# EAGLE board programmer01 (EAGLE 4.14)
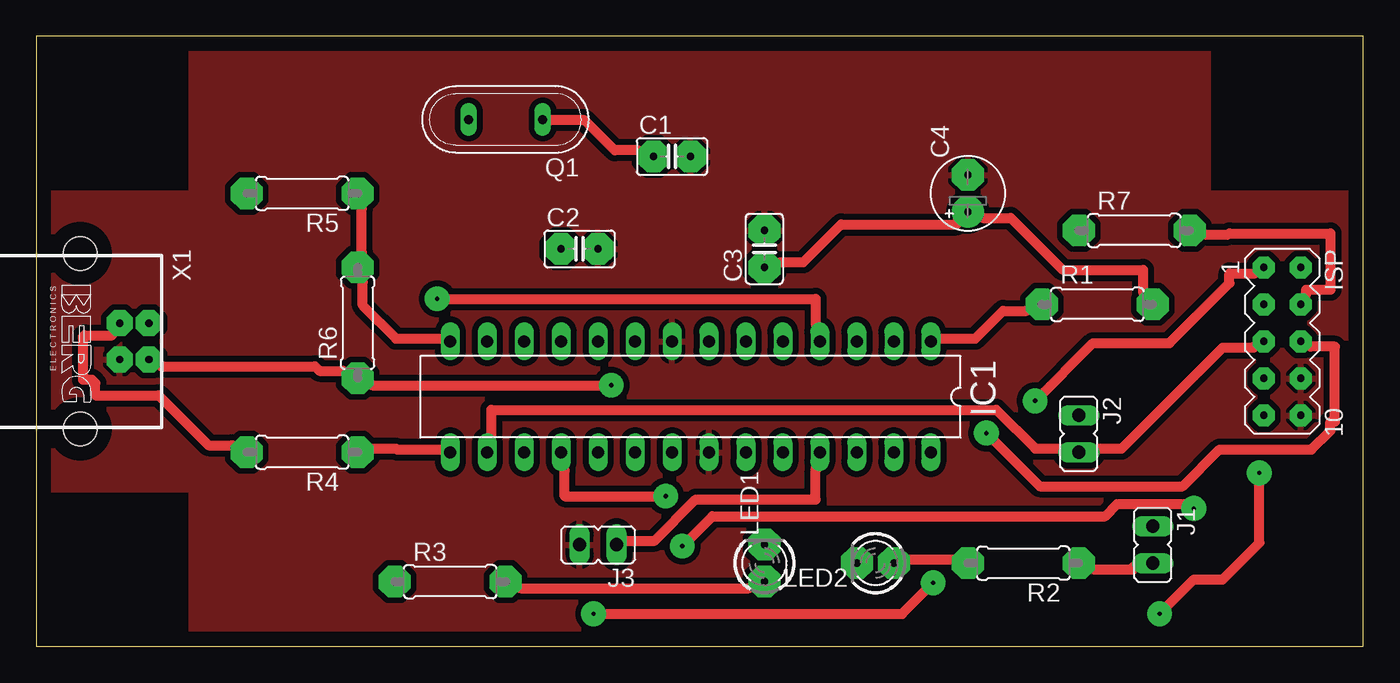
[diagram p0: board, top side]
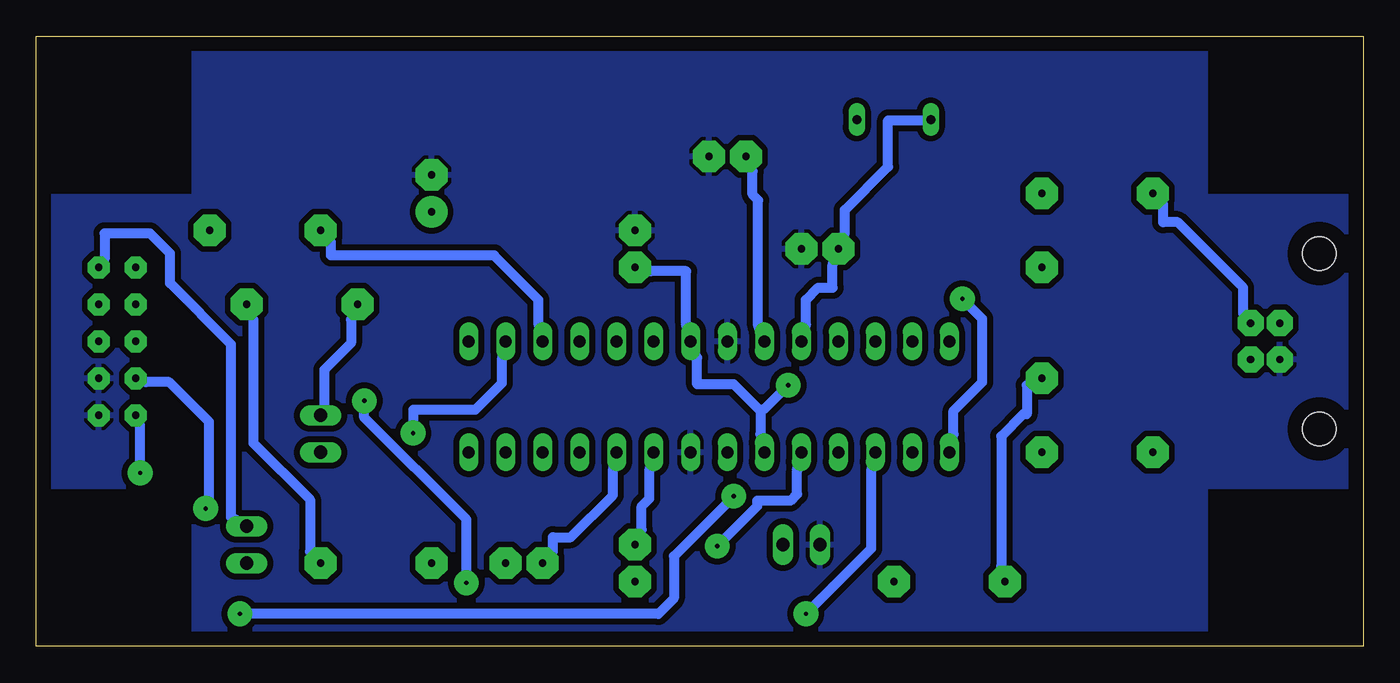
[diagram p1: board, bottom side, seen from below]

Size 91.11 x 41.9 mm. Coordinates in mm from the lower left corner, seen from the top.
Outline: 0,0 91.11,0 91.11,41.9 0,41.9 0,0
Copper layers (1*16): Top 0.035mm / dielectric 1.5mm / Bottom 0.035mm
Design rules "default": minimum track width 0.7mm, minimum drill 0.3mm, track to track 0.4mm, track to pad 0.4mm, pad to pad 0.4mm, via to via 0.4mm, smd to smd 0.4mm, copper to edge 40mil, drill to drill 8mil, minimum pad ring 10mil, minimum via ring 0.7mm, stop-mask expansion 4mil, vias tented up to drill 0mil, thermal gap 10mil
bRestrict: area 0.5,0.6 to 10.6,10.8; area 80.5,0.6 to 90.6,10.8; area 80.5,31.1 to 90.6,41.3; area 0.5,31.1 to 10.6,41.3

## Footprints (pad centres in the part's own frame; a part is rotated, then mirrored left to right if it is on the bottom)
C025-025X050 = drill 0.5 pad 2.18 octagon: 1 -1.27,0; 2 1.27,0
E2,5-5 = drill 0.5 pad 2.18 round: + -1.27,0 | drill 0.5 pad 2.18 octagon: - 1.27,0
DIL28-3 = drill 0.813 long: 1 -16.51,-3.81; 2 -13.97,-3.81; 3 -11.43,-3.81; 4 -8.89,-3.81; 5 -6.35,-3.81; 6 -3.81,-3.81; 7 -1.27,-3.81; 8 1.27,-3.81; 9 3.81,-3.81; 10 6.35,-3.81; 11 8.89,-3.81; 12 11.43,-3.81; 13 13.97,-3.81; 14 16.51,-3.81; 15 16.51,3.81; 16 13.97,3.81; 17 11.43,3.81; 18 8.89,3.81; 19 6.35,3.81; 20 3.81,3.81; 21 1.27,3.81; 22 -1.27,3.81; 23 -3.81,3.81; 24 -6.35,3.81; 25 -8.89,3.81; 26 -11.43,3.81; 27 -13.97,3.81; 28 -16.51,3.81
MA05-2 = drill 0.5 pad 1.5 octagon: 1 -5.08,-1.27; 2 -5.08,1.27; 3 -2.54,-1.27; 4 -2.54,1.27; 5 0,-1.27; 6 0,1.27; 7 2.54,-1.27; 8 2.54,1.27; 9 5.08,-1.27; 10 5.08,1.27
JP1 = drill 0.914 long: 1 0,-1.27; 2 0,1.27
LED3MM = drill 0.5 pad 2.184 octagon: A -1.27,0; K 1.27,0
QS = drill 0.61 long: 1 -2.54,0; 2 2.54,0
0207/7 = drill 0.5 pad 2.18 octagon: 1 -3.81,0; 2 3.81,0
PN61729 = drill 0.5 pad 1.8 octagon: 1 1.25,4.71; 2 -1.25,4.71; 3 -1.25,2.71; 4 1.25,2.71 | hole 2.3: -6.02,0; 6.02,0

## Placement (x,y rotation side)
C1  22p  [C025-025X050]  43.65,33.65 0 top
C2  22p  [C025-025X050]  37.3,27.3 0 top
C3  0.1µ  [C025-025X050]  50,27.3 90 top
C4  10µ  [E2,5-5]  63.97,31.11 90 top
IC1  MEGA8-P  [DIL28-3]  44.92,17.14 180 top
ISP  [MA05-2]  85.56,20.95 270 top
J1  [JP1]  76.67,6.98 180 top
J2  [JP1]  71.59,14.6 180 top
J3  [JP1]  38.57,6.98 90 top
LED1  GREEN  [LED3MM]  50,5.71 90 top
LED2  RED  [LED3MM]  57.62,5.71 180 top
Q1  12MHz  [QS]  32.22,36.19 180 top
R1  10k  [0207/7]  72.86,23.49 0 top
R2  2.55k  [0207/7]  67.78,5.71 180 top
R3  2.55k  [0207/7]  28.41,4.44 0 top
R4  68  [0207/7]  18.25,13.33 180 top
R5  68  [0207/7]  18.25,31.11 180 top
R6  1.5k  [0207/7]  22.06,22.22 90 top
R7  270  [0207/7]  75.4,28.57 0 top
X1  [PN61729]  3.01,20.95 270 top

## Library data of the parts
C1-C4 R1-R7 = rcl
IC1 = avr
ISP = con-lstb
J1-J3 = jumper
LED1 LED2 = led
Q1 = special
X1 = con-berg

## Nets
GND: C1.2 C2.2 C3.2 C4.- IC1.8 IC1.22 ISP.8 ISP.10 J3.2 X1.4
N$1: C2.1 IC1.10 Q1.2
N$2: C1.1 IC1.9 Q1.1
N$3: IC1.1 J2.1 R1.1
N$4: IC1.16 ISP.5 J2.2
N$5: IC1.24 LED2.K
N$6: LED2.A R2.2
N$7: LED1.A R3.2
N$8: IC1.23 LED1.K
N$9: IC1.4 IC1.15 R4.1
N$10: R4.2 X1.3
N$11: R5.2 X1.2
N$12: IC1.14 R5.1 R6.2
N$13: IC1.25 J3.1
N$14: IC1.17 ISP.1
N$15: IC1.19 ISP.7
N$16: IC1.18 ISP.9
N$17: ISP.2 J1.1
N$19: IC1.3 R7.1
N$21: IC1.2 ISP.6
N$22: ISP.4 R7.2
VCC: C3.1 C4.+ IC1.7 IC1.20 J1.2 R1.2 R2.1 R3.1 R6.1 X1.1

## Tracks (layer width: path | path; a pad name or v marks a point on that pad's centre or on a via)
GND
  pour Top: 0.47,10.79 10.63,10.79 10.63,0.63 80.48,0.63 80.48,10.79 90.64,10.79 90.64,31.11 80.48,31.11 80.48,41.27 10.63,41.27 10.63,31.11 0.47,31.11
  pour Bottom: 0.47,31.11 10.63,31.11 10.63,41.27 80.48,41.27 80.48,31.11 90.64,31.11 90.64,10.79 80.48,10.79 80.48,0.63 10.63,0.63 10.63,10.79 0.47,10.79
N$1
  Bottom 0.7: Q1.2 30.19,36.14 32.63,36.14 32.63,32.94 35.6,29.97 35.6,28.37 C2.1 36.44,26.23 36.44,24.63 37.43,24.63 38.27,23.79 38.27,22.2 IC1.10
N$2
  Top 0.7: Q1.1 35.29,36.14 37.66,36.14 39.71,34.08 41.31,34.08 C1.1
  Bottom 0.7: IC1.9 41.54,22.04 41.54,30.65 41.92,31.03 41.92,32.63 C1.1
N$3
  Top 0.7: IC1.1 62.04,21.13 64.48,21.13 66.38,23.03 67.98,23.03 R1.1
  Bottom 0.7: J2.1 71.34,16.56 71.34,18.99 69.51,20.82 69.51,22.42 R1.1
N$4
  Top 0.7: IC1.16 31.25,14.58 31.25,16.25 65.93,16.25 68.59,13.58 70.19,13.58 J2.2 72.94,13.58 74.54,13.58 81.47,20.52 83.6,20.52 83.6,20.59 ISP.5
N$5
  Bottom 0.7: IC1.24 51.52,12.06 51.52,10.38 54.42,7.49 55.64,7.49 55.64,6.5 LED2.K
N$6
  Top 0.7: R2.2 62.95,5.96 59.91,5.96 LED2.A
N$7
  Top 0.7: R3.2 33.24,3.98 48.93,3.98 LED1.A
N$8
  Bottom 0.7: IC1.23 49.01,12.06 49.01,10.16 49.54,9.62 49.54,8.02 LED1.K
N$9  (via drill 0.3)
  Top 0.7: IC1.15 27.83,13.51 24.78,13.51 24.7,13.58 23.1,13.58 R4.1 | v27.52,23.87 53.5,23.87 53.5,22.2 IC1.4
  Bottom 0.7: v27.52,23.87 26.15,22.5 26.15,18.16 28.13,16.18 28.13,14.58 IC1.15
N$10
  Top 0.7: X1.3 5.19,21.51 5.19,21.36 3.29,21.36 3.21,21.28 3.21,18.31 3.82,18.31 4.05,18.08 4.05,17.24 8.39,17.24 11.82,13.81 13.42,13.81 R4.2
N$11
  Bottom 0.7: X1.2 8.24,22.88 8.24,24.63 12.74,29.13 13.73,29.13 13.73,30.35 R5.2
N$12
  Top 0.7: IC1.14 27.83,21.13 24.7,21.13 22.42,23.41 22.42,25.01 R6.2 22.34,27.07 22.34,30.04 R5.1
N$13
  Top 0.7: IC1.25 53.5,12.06 53.5,10.08 45.28,10.08 42.46,7.26 40.48,7.26 J3.1
N$14  (via drill 0.3)
  Top 0.7: v38.27,2.23 59.45,2.23 v61.58,4.36 | v68.59,16.86 72.55,20.82 77.81,20.82 81.93,24.94 81.93,25.62 83.68,25.62 ISP.1
  Bottom 0.7: v38.27,2.23 33.77,6.73 33.77,12.06 IC1.17 | v61.58,4.36 61.58,8.71 68.59,15.72 v68.59,16.86
N$15  (via drill 0.3)
  Top 0.7: v44.36,6.88 46.42,8.94 73.39,8.94 74.23,9.77 79.19,9.77 v79.49,9.47
  Bottom 0.7: v44.36,6.88 41.62,9.62 41.62,10 39.33,10 38.88,10.46 38.88,12.06 IC1.19 | v79.49,9.47 79.34,9.47 79.34,9.54 79.26,9.62 79.26,15.41 82,18.16 83.6,18.16 ISP.7
N$16  (via drill 0.3)
  Top 0.7: v43.22,10.31 36.28,10.31 36.28,12.06 IC1.18 | v77.13,2.23 79.49,4.59 81.47,4.59 83.98,7.11 v83.98,11.91
  Bottom 0.7: v43.22,10.31 47.33,6.19 47.33,3.3 48.4,2.23 v77.13,2.23 | v83.98,11.91 83.98,15.18 ISP.9
N$17
  Bottom 0.7: J1.1 77.74,8.86 77.74,20.75 81.93,24.94 81.93,26.99 83.3,28.37 86.42,28.37 86.42,26.61 ISP.2
N$19
  Bottom 0.7: IC1.3 56.63,22.2 56.63,23.79 59.68,26.84 70.88,26.84 70.88,27.76 R7.1
N$21  (via drill 0.3)
  Top 0.7: v65.24,14.65 68.9,10.99 78.73,10.99 81.24,13.51 87.57,13.51 88.86,14.8 88.86,15.41 89.17,15.41 89.17,20.59 87.49,20.59 ISP.6
  Bottom 0.7: v65.24,14.65 65.24,16.25 60.97,16.25 59.14,18.08 59.14,19.68 IC1.2
N$22
  Top 0.7: ISP.4 87.19,24.18 87.19,24.48 88.86,24.48 88.86,28.37 81.93,28.37 81.85,28.29 80.25,28.29 R7.2
VCC  (via drill 0.3)
  Top 0.7: X1.1 8.55,19.3 8.55,19.22 19.14,19.22 19.44,18.92 21.04,18.92 R6.1 23.1,17.93 v39.48,17.93 | J1.2 75.3,5.43 75.3,5.28 72.63,5.28 R2.1 | C3.1 51.07,26.39 52.67,26.39 55.26,28.98 63.18,28.98 63.18,29.13 C4.+ 65.01,29.43 66.92,29.43 70.5,25.85 75.98,25.85 75.98,24.33 R1.2
  Bottom 0.7: R3.1 24.85,5.51 24.85,14.42 23.33,15.95 23.1,15.95 23.1,17.93 R6.1 | 41.39,16.18 41.39,14.58 IC1.20 | 41.39,16.18 43.22,18 45.73,18 45.73,19.83 IC1.7 46.49,22.2 46.49,25.78 48.93,25.78 C3.1 | R2.1 72.33,6.5 72.33,10.08 76.21,13.97 76.21,22.42 R1.2 | v39.48,17.93 41.09,16.33 41.39,16.18